# EAGLE board tastatura 4_4 (EAGLE 9.7.0)

Size 168.71 x 165.39 mm. Coordinates in mm from the lower left corner, seen from the top.
Outline: 0,0 168.71,0 168.71,165.38 0,165.38 0,0
Copper layers (1*16): Top 0.035mm / dielectric 1.5mm / Bottom 0.035mm
Design rules "default": minimum track width 6mil, minimum drill 0.35mm, track to track 6mil, track to pad 6mil, pad to pad 6mil, via to via 6mil, smd to smd 6mil, copper to edge 40mil, drill to drill 6mil, minimum pad ring 10mil, minimum via ring 8mil, stop-mask expansion 4mil, vias tented up to drill 0mil, thermal gap 10mil

## Footprints (pad centres in the part's own frame; a part is rotated, then mirrored left to right if it is on the bottom)
LEDRD254W60D565H860B_G = drill 0.981 pad 1.581: 1 -1.27,0; 2 1.27,0
7SEG-13 = drill 0.813 long: 1 -5.08,-7.62; 2 -2.54,-7.62; 3 0,-7.62; 4 2.54,-7.62; 5 5.08,-7.62; 6 5.08,7.62; 7 2.54,7.62; 8 0,7.62; 9 -2.54,7.62; 10 -5.08,7.62
1X08 = drill 1.016 long: 1 -8.89,0; 2 -6.35,0; 3 -3.81,0; 4 -1.27,0; 5 1.27,0; 6 3.81,0; 7 6.35,0; 8 8.89,0
RESAD1016W63L850D250B = drill 0.83 pad 1.43: 1 -5.08,0; 2 5.08,0
ARDUINO-UNO-R3-SHIELD = drill 1.016 pad 1.88: 3.3V 24.13,-2.54; 5V 24.13,0; A0 24.13,12.7; A1 24.13,15.24; A2 24.13,17.78; A3 24.13,20.32; A4 24.13,22.86; A5 24.13,25.4; AREF -24.13,-13.97; D2 -24.13,20.32; D3 -24.13,17.78; D4 -24.13,15.24; D5 -24.13,12.7; D6 -24.13,10.16; D7 -24.13,7.62; D8 -24.13,3.81; D9 -24.13,1.27; D10 -24.13,-1.27; D11 -24.13,-3.81; D12 -24.13,-6.35; D13 -24.13,-8.89; GND@0 24.13,2.54; GND@1 24.13,5.08; GND@2 -24.13,-11.43; IOREF 24.13,-7.62; NC 24.13,-10.16; RES 24.13,-5.08; RX -24.13,25.4; SCL -24.13,-19.05; SDA -24.13,-16.51; TX -24.13,22.86; VIN 24.13,7.62

## Placement (x,y rotation side)
D1  GREEN  [LEDRD254W60D565H860B_G]  30.62,70.79 180 top
DIGIT1  7SEG-CK  [7SEG-13]  11.57,60.63 0 top
KEYPAD1  KEYPAD-4X4  [1X08]  56.86,159.11 0 top
R1  200  [RESAD1016W63L850D250B]  6.33,11.51 90 top
R2  200  [RESAD1016W63L850D250B]  8.87,8.97 90 top
R3  200  [RESAD1016W63L850D250B]  29.35,55.55 90 top
R4  200  [RESAD1016W63L850D250B]  13.95,11.51 90 top
R5  200  [RESAD1016W63L850D250B]  34.43,55.55 90 top
R6  200  [RESAD1016W63L850D250B]  36.97,55.55 90 top
R7  200  [RESAD1016W63L850D250B]  39.51,55.55 90 top
R8  200  [RESAD1016W63L850D250B]  42.05,55.55 90 top
R9  200  [RESAD1016W63L850D250B]  16.49,8.97 90 top
R10  200  [RESAD1016W63L850D250B]  16.77,107.84 90 top
R11  200  [RESAD1016W63L850D250B]  14.23,105.3 90 top
R13  200  [RESAD1016W63L850D250B]  9.15,105.3 90 top
R14  200  [RESAD1016W63L850D250B]  6.61,107.84 90 top
U1  ARDUINO-UNO-R3-SHIELD  [ARDUINO-UNO-R3-SHIELD]  138.87,63 180 top

## Library data of the parts
D1 = Tinkercad; CATEGORY: Opto-Electronic; SUB-CATEGORY: LED; VALUE: LED_GREEN
DIGIT1 = Tinkercad; CATEGORY: Opto-Electronic; SUB-CATEGORY: Display; TYPE: 7-Segment
KEYPAD1 R1-R11 R13 R14 U1 = Tinkercad

## Nets
D1_C: D1.2 R3.2
DIGIT1_A: DIGIT1.7 R11.1
DIGIT1_B: DIGIT1.6 R10.1
DIGIT1_C: DIGIT1.4 R4.2
DIGIT1_D: DIGIT1.2 R2.2
DIGIT1_DP: DIGIT1.5 R9.2
DIGIT1_E: DIGIT1.1 R1.2
DIGIT1_F: DIGIT1.9 R13.1
DIGIT1_G: DIGIT1.10 R14.1
U1_A0: KEYPAD1.1 R5.2 U1.A0
U1_A1: KEYPAD1.2 R6.2 U1.A1
U1_A2: KEYPAD1.3 R7.2 U1.A2
U1_A3: KEYPAD1.4 R8.2 U1.A3
U1_A5: R9.1 U1.A5
U1_D2: D1.1 U1.D2
U1_D3: R4.1 U1.D3
U1_D4: R2.1 U1.D4
U1_D5: R1.1 U1.D5
U1_D6: R14.2 U1.D6
U1_D7: R13.2 U1.D7
U1_D8: R11.2 U1.D8
U1_D9: R10.2 U1.D9
U1_D10: KEYPAD1.8 U1.D10
U1_D11: KEYPAD1.7 U1.D11
U1_D12: KEYPAD1.6 U1.D12
U1_D13: KEYPAD1.5 U1.D13
U1_GND: DIGIT1.3 R3.1 R5.1 R6.1 R7.1 R8.1 U1.GND@0 U1.GND@1 U1.GND@2

## Tracks (layer width: path | path; a pad name or v marks a point on that pad's centre or on a via)
D1_C  (1 unrouted)
DIGIT1_A  (1 unrouted)
DIGIT1_B  (1 unrouted)
DIGIT1_C  (1 unrouted)
DIGIT1_D  (1 unrouted)
DIGIT1_DP  (1 unrouted)
DIGIT1_E  (1 unrouted)
DIGIT1_F  (1 unrouted)
DIGIT1_G  (1 unrouted)
U1_A0  (2 unrouted)
U1_A1  (2 unrouted)
U1_A2  (2 unrouted)
U1_A3  (2 unrouted)
U1_A5  (1 unrouted)
U1_D2  (1 unrouted)
U1_D3  (1 unrouted)
U1_D4  (1 unrouted)
U1_D5  (1 unrouted)
U1_D6  (1 unrouted)
U1_D7  (1 unrouted)
U1_D8  (1 unrouted)
U1_D9  (1 unrouted)
U1_D10  (1 unrouted)
U1_D11  (1 unrouted)
U1_D12  (1 unrouted)
U1_D13  (1 unrouted)
U1_GND  (8 unrouted)